# Altium PCB MIC29302.PcbDoc
Units mil, origin at the board's own origin, x right, y up, seen from the top; angles counter-clockwise.
Board outline 6000 x 4000 mil, 2 copper layers (Top Layer, Bottom Layer), stack 12.8 mil thick; 15 components, 7 nets, 48 pads, 5 vias.
Unrouted connection lines stored in the file: 1.
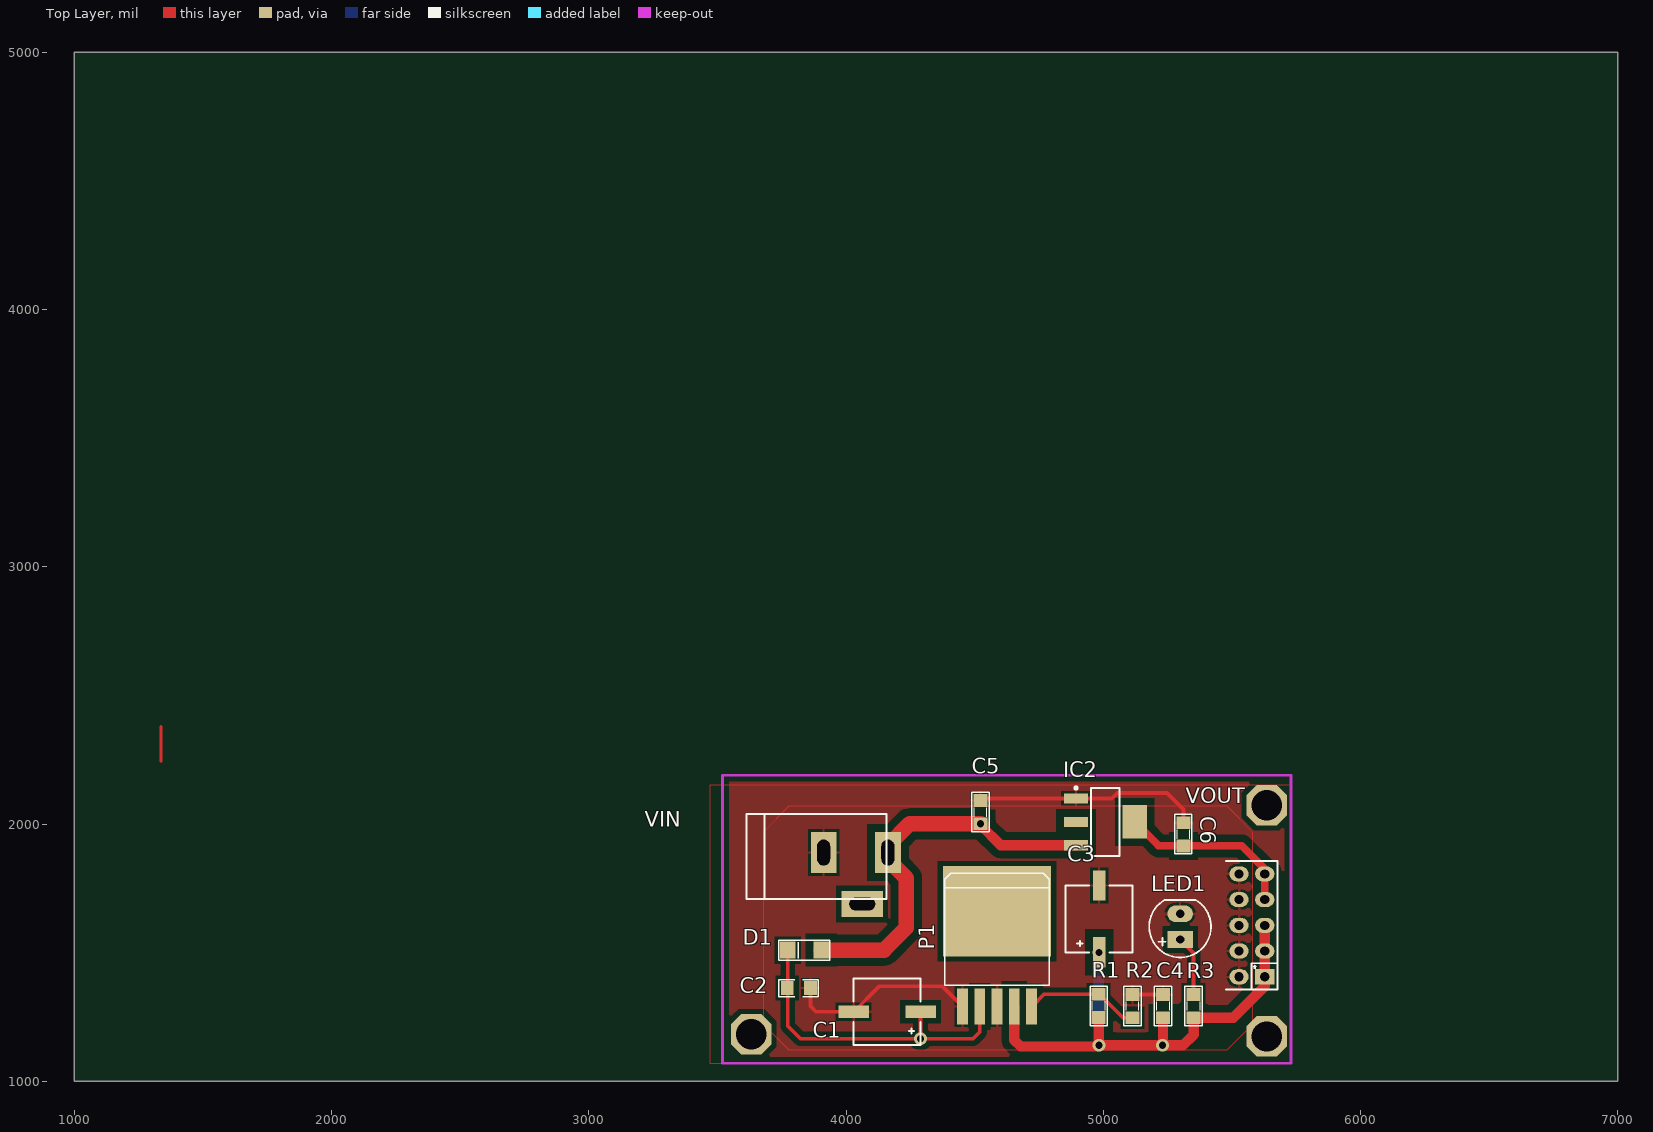
[diagram p0: Top Layer view]
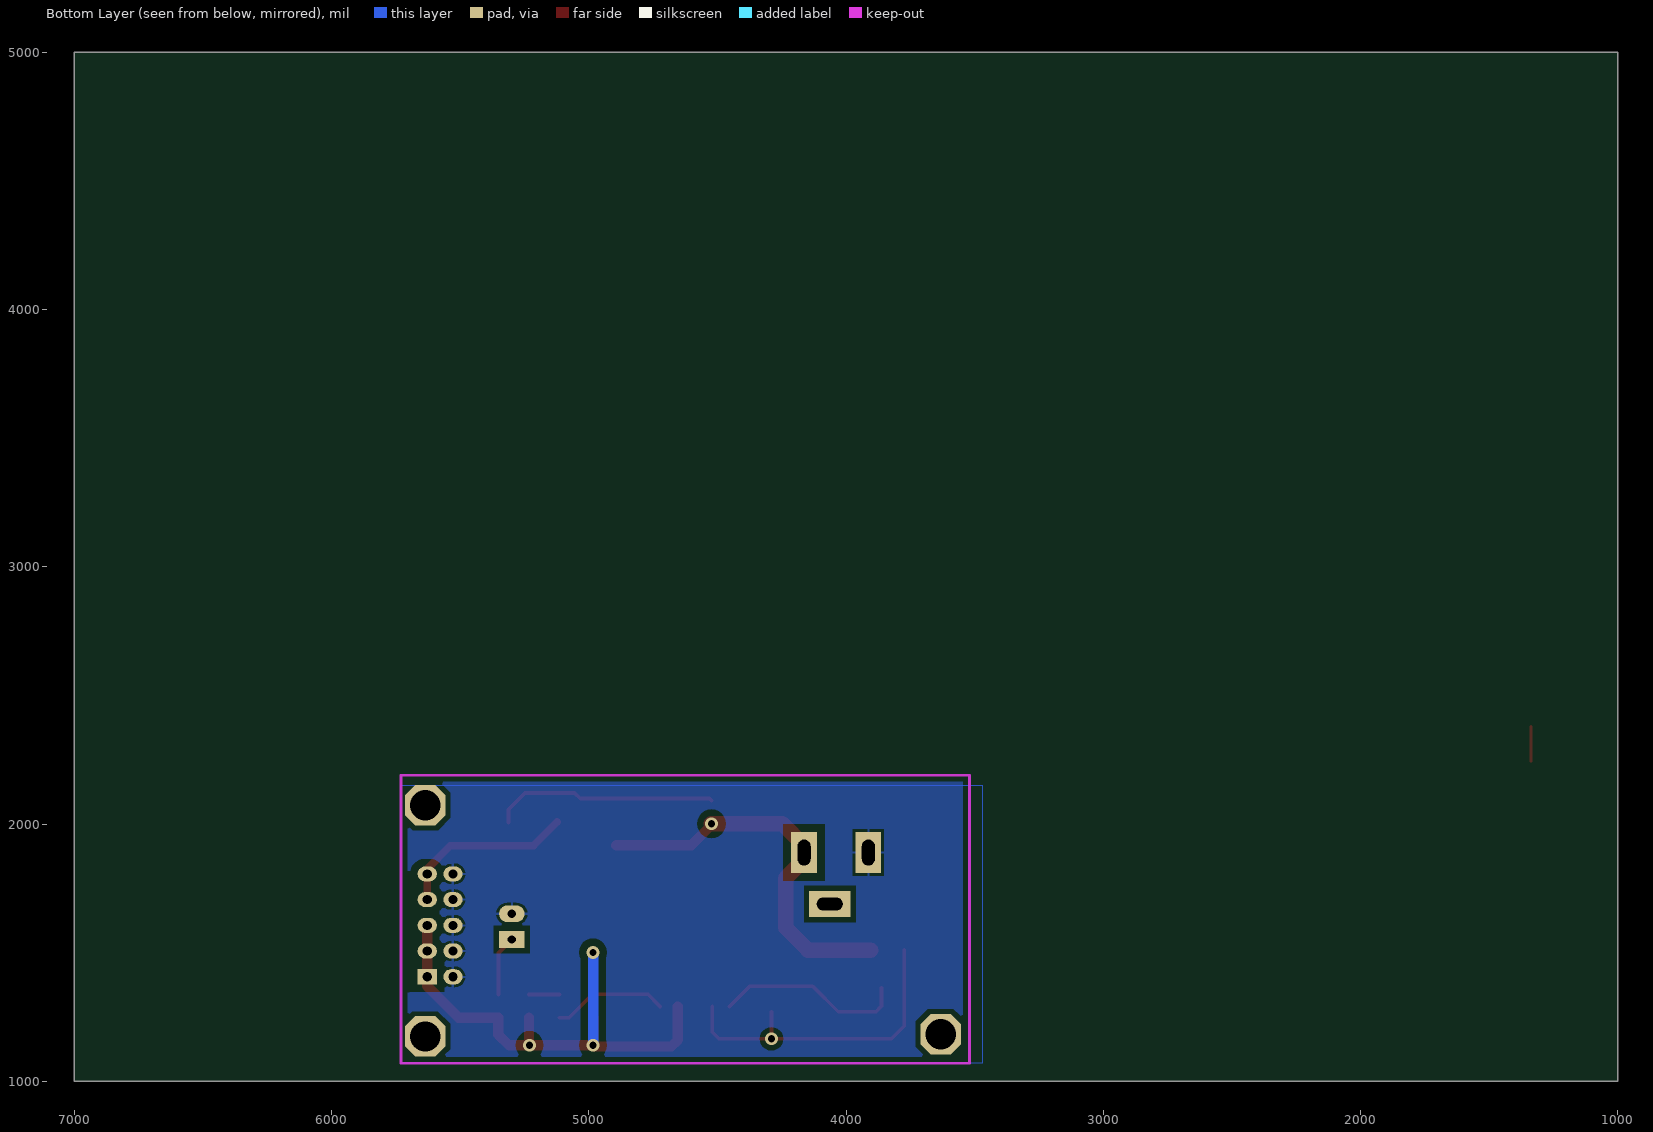
[diagram p1: Bottom Layer view, seen from below]
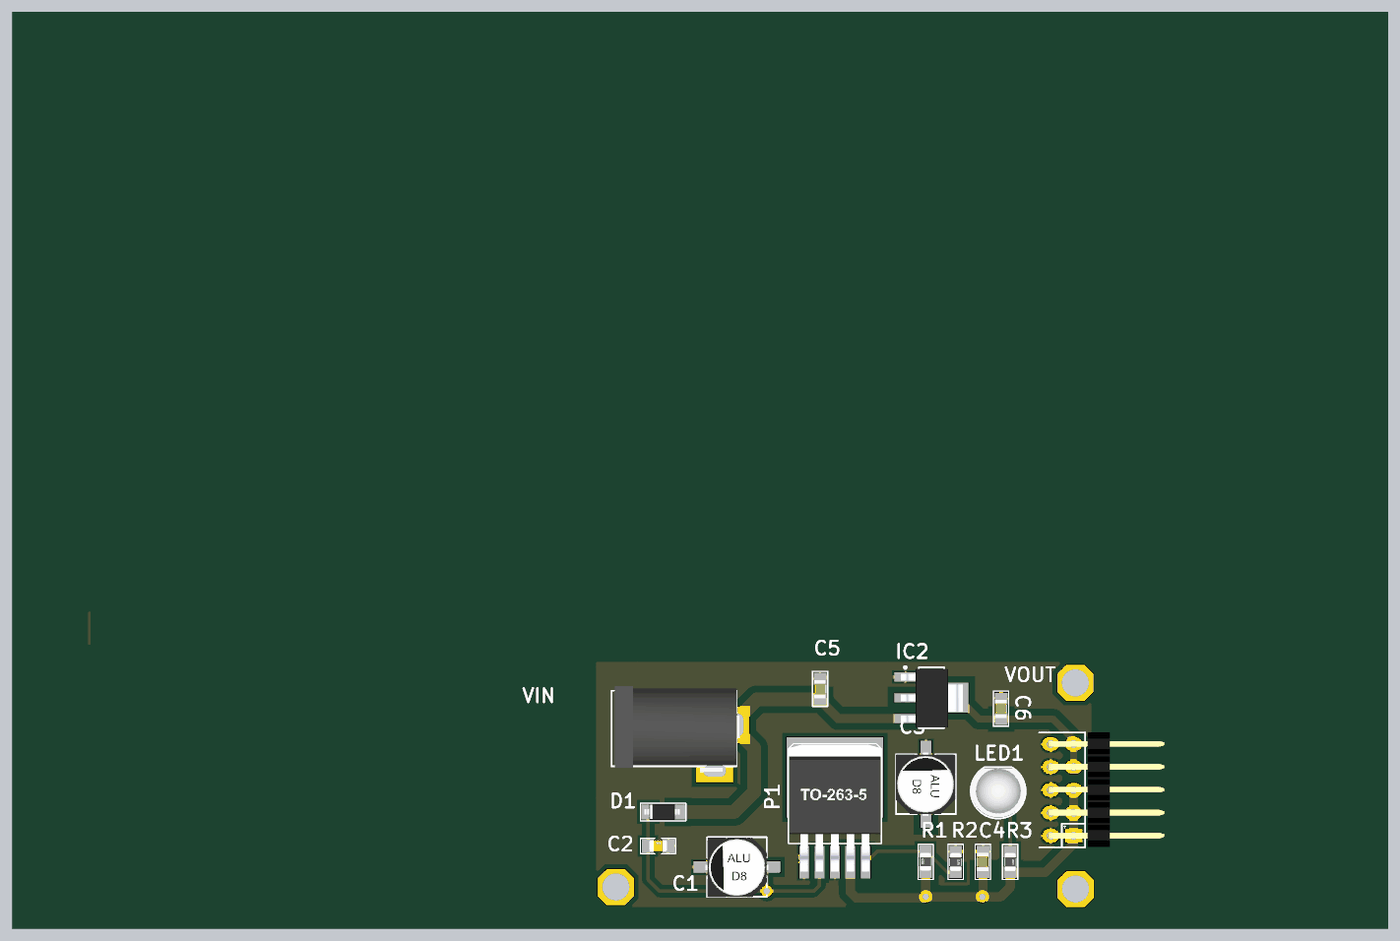
[diagram p2: 3D render of the assembled board from above, using the file's embedded part models]

## Layer stack, top to bottom
Top Layer: signal copper 1.4
Dielectric 1: core 10, FR-4, Dk 4.2
Bottom Layer: signal copper 1.4

## Board outline
1000,1000 7000,1000 7000,5000 1000,5000

## Design rules (kind name [scope] priority, off if disabled: settings)
Clearance 3.3V [InNet('3.3V')] p1: gap=30
Clearance VIN [InNet('IN')] p2: gap=30
Clearance VOUT [InNet('OUT')] p3: gap=30
Clearance [All] p4: gap=20
PolygonConnect [All] p1: connectstyle=Relief reliefconductorwidth=10 reliefentries=4 polygonreliefangle="90 Angle" airgapwidth=10
RoomDefinition Sheet2 [InComponentClass('Sheet2')] p1: confinementstyle=ConfineIn formatcopy=TRUE lockcomponents=FALSE outline 0,0 2000,0 2000,1000 0,1000
RoutingVias [All] p1: holewidth=28 width=50 viastyle="Through Hole" minholewidth=28 minwidth=50 maxholewidth=28 maxwidth=50
SolderMaskExpansion [All] p1: expansion=4
UnpouredPolygon [All] p1: allowunpoured=FALSE
Width 3.3 [InNet('3.3V')] p1: maxlimit=30 minlimit=30 preferedwidth=30
Width OUT [InNet('OUT')] p2: maxlimit=40 minlimit=40 preferedwidth=40
Width IN [InNet('IN')] p3: maxlimit=60 minlimit=60 preferedwidth=60
Width [All] p4: maxlimit=15 minlimit=15 preferedwidth=15
29 further rules are at their usual default settings.

## Components (designator, comment, footprint, x,y, rotation, side; value= is the part's Value field where it differs from the comment)
C1 "100uF/450V" CAP-D8-220uF/16V 4160,1270 r180 top
C2 "1uF/450V" CAP0805 3816.52,1362 r0 top
C3 "220uF/450V" CAP-D8-220uF/16V 4984,1631 r90 top
C4 "103" SM-0805 5232.67,1292 r270 top
C5 "103" SM-0805 4523,2046 r270 top
C6 "103" SM-0805 5312,1960 r270 top
D1 "1N5822" Diode1206 3838.52,1510 r180 top
IC2 "LM1117" SOT223-4N 5008,2008 r0 top
LED1 "LED" LED-5-RED 5299,1551 r90 top
P1 "MIC29302" LM2576_TO-263 4587,1590 r0 top
R1 "100k" RES0805 4982,1248 r90 top
R2 "43k" RES0805 5113.83,1337 r270 top
R3 "470" RES0805 5351.5,1337 r270 top
VIN "JP2" DC-IN 4038,1789 r0 top
VOUT "Header 5x2" HED2X5_cen 5628,1406 r90 top

## Footprints (in the part's own frame and the unit in brackets; to place one, negate y for a bottom-side part, rotate by r counter-clockwise, add the part's x,y. Pads: shape width x height; smd on the part's side, far side on the other; paste and mask are expansions set on the pad)
CAP0805 [mil]
  rect 50x55 smd: 1(-45,0) 2(45,0)
  silkscreen extent -77,-34 76,33, body extent -39,-25 39,25, height 31
CAP-D8-220uF/16V [mm] "6.3 x 7.7 mm"
  rect 3x1.25 smd: 1(-3.302,0) 2(3.302,0)
  silkscreen extent -3.3,-3.3 3.3,3.3, body extent -3.5,-3.25 3.5,3.35, height 7.72
DC-IN [mil] "Jac DC input"
  rect 100x160 hole 50 slot 100 at 90 deg: 1(125,100) 2(-125,100)
  rect 160x100 hole 50 slot 100 at 0 deg: 3(25,-100)
  silkscreen extent -425,-80 120,250, body extent -410,-105 134,269, height 434
Diode1206 [mil]
  rect 60x65 smd: 1(-65,0) 2(65,0)
  silkscreen extent -99,-38 99,39, body extent -72,-35 82,35, height 46
HED2X5_cen [mm] "Connector; Header; 5x2 Position"
  rect 1.5x1.9 hole 0.9: 1(0,0)
  oval 1.5x1.9 hole 0.9: 2(2.54,0) 3(5.08,0) 4(7.62,0) 5(10.16,0) 6(0,2.54) 7(2.54,2.54) 8(5.08,2.54) 9(7.62,2.54) 10(10.16,2.54)
  silkscreen extent -1.27,-1.27 11.43,3.81, body extent -1.24,-10.02 11.46,2.86, height 5.02
LED-5-RED [mil] "LED 2 PIN, 5 ly , Only colour,pin to pin 100mil"
  rect 65x100 hole 32: 1(0,0)
  oval 65x100 hole 32: 2(100,0)
  silkscreen extent -70,-120 154,120, body extent -65,-119 149,118, height 339
LM2576_TO-263 [mil]
  rect 420x350 smd: 0(0,70.87)
  rect 42x140 smd: 1(-134,-299.13) 2(-67,-299.21) 3(0,-299.13) 4(67,-299.13) 5(134,-299.13)
  silkscreen extent -203,-218 203,218, body extent -200,-339 200,213, height 180
RES0805 [mil]
  rect 50x55 smd: 1(0,0) 2(90,0)
  silkscreen extent -32,-34 121,33, body extent 6,-25 84,25, height 31
SM-0805 [mil] "Compoment SMD 80x50mil"
  rect 50x55 smd: 1(-45,0) 2(45,0)
  silkscreen extent -77,-34 76,33, body extent -40,-27 40,23, height 24
SOT223-4N [mm] "SOT223, 4-Leads, Body 6.5x3.5mm, Pitch 2.3mm, Lead Span 7mm, IPC Medium Density"
  rect 2.4x1 smd: 1(-2.9,2.3) 2(-2.9,0) 3(-2.9,-2.3)
  rect 2.4x3.3 smd: 4(2.9,0)
  silkscreen extent -3.02,-3.35 1.4,3.47, body extent -3.39,-3.27 3.5,3.23, height 1.72

## Part data
C1 C2 C3: library part CP9, "Cap 10000uF/63V"
C4 C5 C6: library part CM, "Cap SMD"
D1: library part D5A, "Diode 5A"
IC2: "3v3"
LED1: "LED Single colour Green and Red"
P1: library part LM2576
R1 R2 R3: library part R, "Resistor 1/4W"
VIN: library part Con2, "Connector 2"
VOUT: library part HED5x2

## Free pads (board coordinates)
  oct 157.48x157.48 hole 118.11: 3(3632,1183) 3(5635,2073) 3(5636,1174)

## Via types
v1: diameter 50, hole 28, Top Layer to Bottom Layer, 5 vias

## Nets (pads, with @x,y where several pads share a name; then routed paths per layer and width w, separated by ;. In a path a pad name is that pad's centre, name@x,y a point inside that pad or via, vN(x,y) a via of type N, cw(c..) or ccw(c..) an arc to the next point about the centre after c; other vN are vias at no path point)
3.3V: C6.2 IC2.2 IC2.4 VOUT.4 VOUT.5 | length 700.6
  Top Layer w30: IC2.4 5215.17,1915 C6.2 5538,1915 5628,1825 VOUT.5 VOUT.4
GND: C1.2 C2.2 C3.2 C4.1 C5.1 C6.1 IC2.1 LED1.2 P1.1 P1.3 R2.1 VIN.2 VOUT.6 VOUT.7 VOUT.8 VOUT.9 VOUT.10 | length 1741.4
  Top Layer w15: C2.2 3861.52,1292.48 3884,1270 C1.2 4129,1369 4374.87,1369 P1.1 ; C5.1 4530.55,2098.55 IC2.1 5033.34,2098.55 5055.25,2120.46 5247.54,2120.46 5312,2056 C6.1 ; R2.1 C4.1
IN: C5.2 D1.1 IC2.3 VIN.1 | length 1515.5
  Top Layer w40: C5.2@4523,1996 4601.55,1917.45 IC2.3
  Top Layer w60: D1.1 4148,1510 4235,1597 4235,1789 4163,1861 VIN.1 4163,1917 4247,2001 v1(4523,2001)
NetC1_1: C1.1 C2.1 D1.2 P1.2 | length 1278.1
  Top Layer w15: D1.2 3773.52,1214.48 3823,1165 v1(4290,1165) ; C1.1 v1(4290,1165) ; P1.2 4520,1191 4494,1165 v1(4290,1165)
NetLED1_1: LED1.1 R3.1 | length 235.7
  Top Layer w15: LED1.1 5351.5,1498.5 R3.1
NetP1_5: P1.5 R1.2 R2.2 | length 448.6
  Top Layer w15: P1.5@4722.5,1290.87 4769.63,1338 R1.2 4986,1338 5077,1247 R2.2
OUT: C3.1 C4.2 P1.4 R1.1 R3.2 VOUT.1 VOUT.2 VOUT.3 | length 2064.9
  Top Layer w40: P1.4 4654,1160 4679,1135 4978,1135 v1(4983,1140) ; R1.1 4983,1247 v1(4983,1140) ; C4.2 5232.67,1142.67 v1(5230,1140) ; VOUT.3 VOUT.2 VOUT.1 5628,1370 5505,1247 R3.2 5351.5,1181.5 5310,1140 v1(5230,1140) ; v1(4983,1140) v1(5230,1140)
  Bottom Layer w40: v1(4983,1140) 4983,1500 v1(4984,1501)
pads on no net: P1.0 VIN.3
copper on no net: | length 135
  Top Layer w10: 1337,2244 1337,2379

## Polygon pours and split planes (outlines as drawn)
GND on Top Layer "Top Layer-No Net" (solid, remove dead copper, pour order 15): 5730,2190 3520,2190 3520,1070 5730,1070
GND on Top Layer "Top Layer-No Net" (solid, remove dead copper, shelved, pour order 4): 3780,2070 5480,2070 5580,1970 5580,1220 5480,1120 3780,1120 3680,1220 3680,1970 3780,2070
GND on Top Layer "Top Layer-No Net" (solid, remove dead copper, shelved, pour order 15): 3470,2150 3470,1070 5730,1070 5730,2150
GND on Bottom Layer "Top Layer-No Net" (solid, remove dead copper, pour order 13): 3520,2190 5730,2190 5730,1070 3520,1070
GND on Bottom Layer "Top Layer-No Net" (solid, remove dead copper, shelved, pour order 17): 3470,2150 3470,1070 5730,1070 5730,2150

## Keep-outs
Keep-Out Layer:
  lines w10: 3520,1070 5730,1070 5730,2150 5730,2190 3569,2190 3520,2190 3520,2147 3520,2100 3520,1070